# Altium PCB blheli_S.PcbDoc
Units mil, origin at the board's own origin, x right, y up, seen from the top; angles counter-clockwise.
Board outline 550.03 x 1061.13 mil, 4 copper layers (Top Layer, Internal Plane 1, Signal Layer 1, Bottom Layer), stack 30.634 mil thick; 51 components, 33 nets, 180 pads, 52 vias.
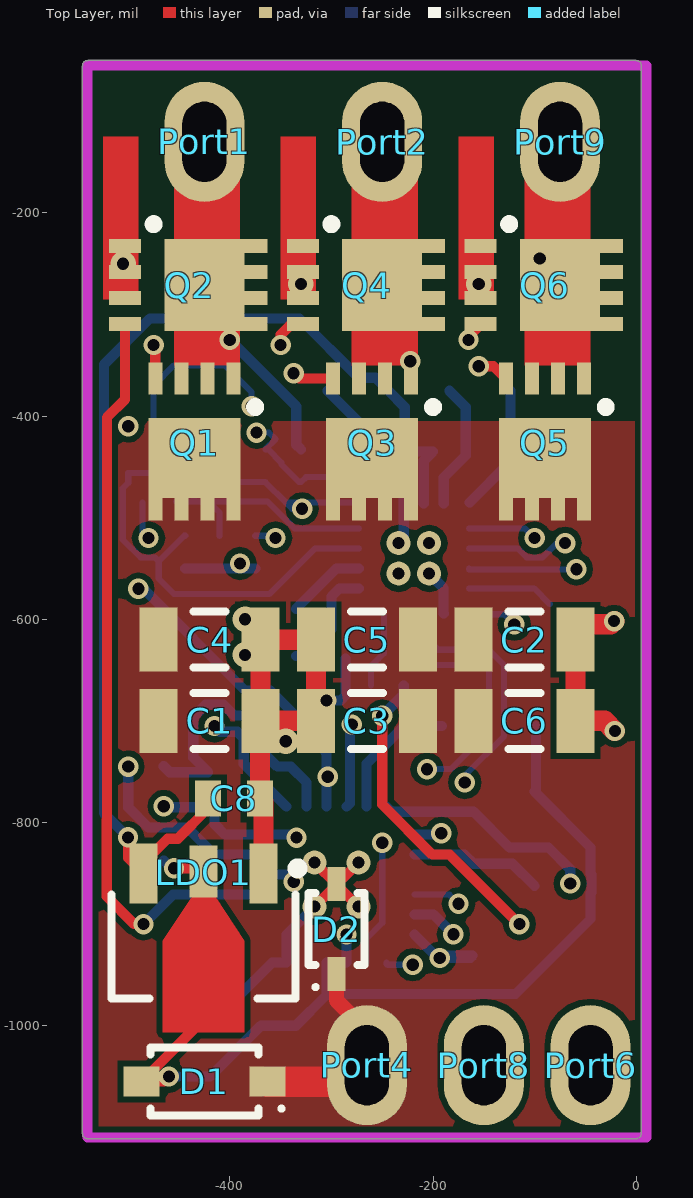
[diagram p0: Top Layer view]
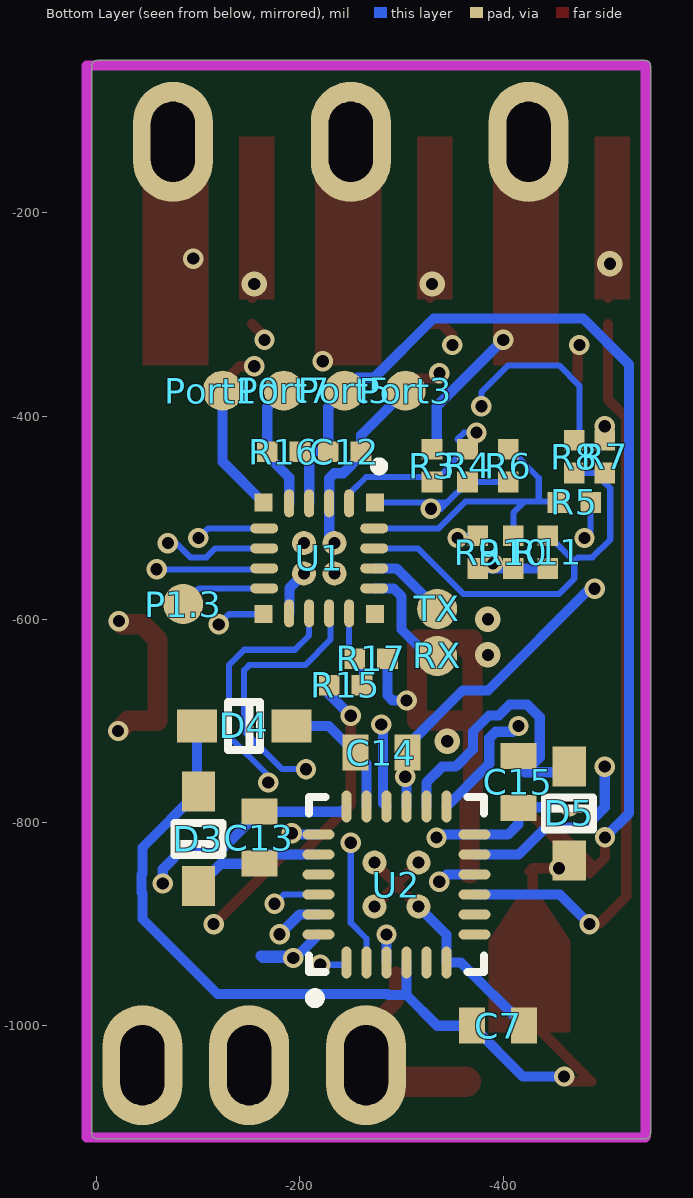
[diagram p1: Bottom Layer view, seen from below]
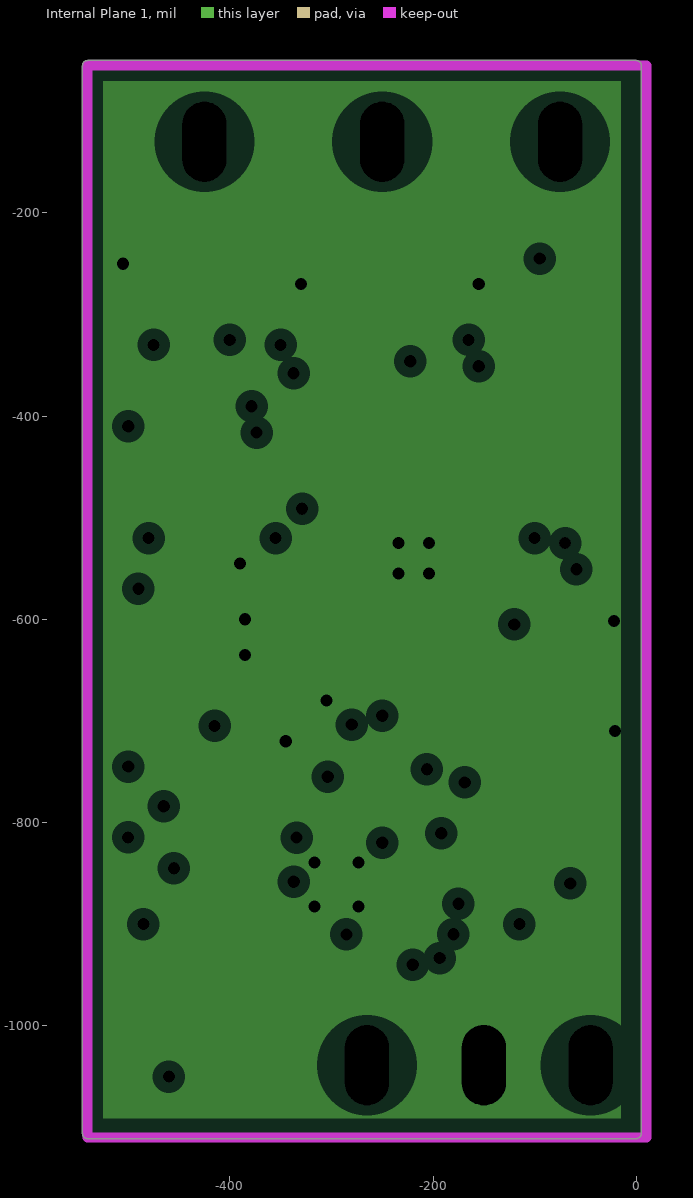
[diagram p2: Internal Plane 1, clearances drawn from the general rule]
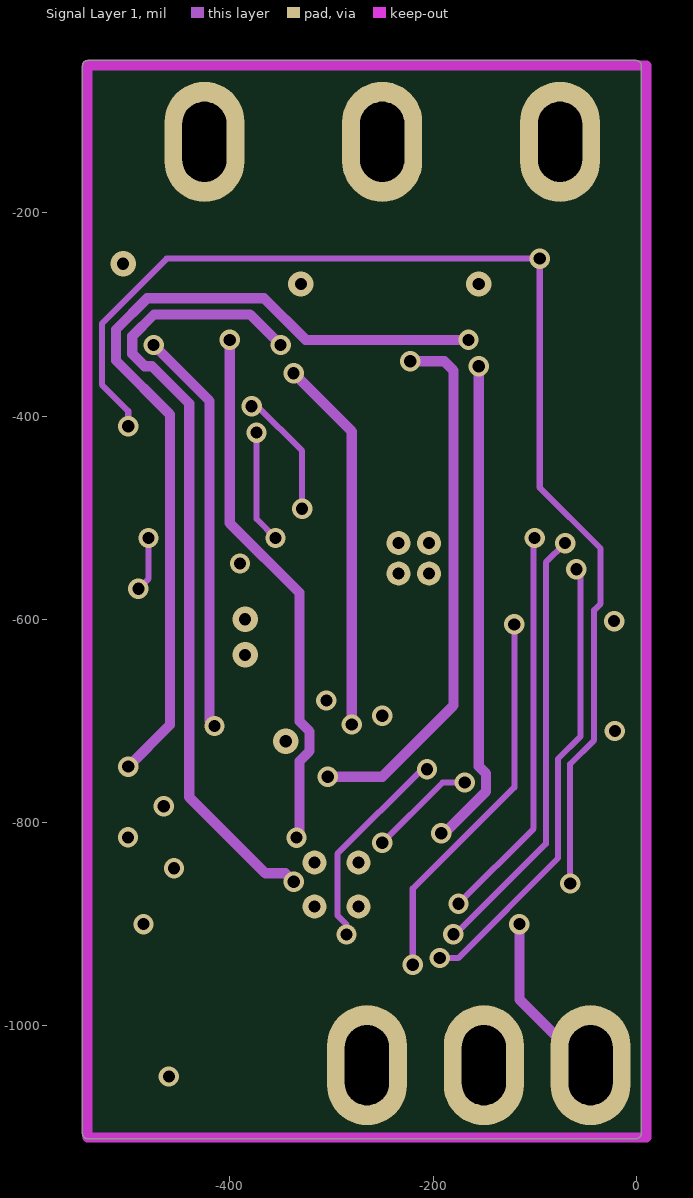
[diagram p3: Signal Layer 1]

## Layer stack, top to bottom
Top Solder: solder mask 0.4, Solder Resist, Dk 3.5
Top Layer: signal copper 1.4
Dielectric 1: core 10, FR-4, Dk 4.2
Internal Plane 1: plane copper 1.417, net GND
Dielectric 3: core 10, Dk 4.2
Signal Layer 1: signal copper 1.417
Dielectric 4: prepreg 5, Dk 4.2
Bottom Layer: signal copper 1.4
Bottom Solder: solder mask 0.4, Solder Resist, Dk 3.5

## Board outline
-545.02,-1106.1 ccw(c-540,-1106.1) -540,-1111.12 0,-1111.12 ccw(c0,-1106.1) 5.02,-1106.1 5.02,-55 ccw(c0,-55) 0,-49.99 -540,-49.99 ccw(c-540,-55) -545.02,-55

## Design rules (kind name [scope] priority, off if disabled: settings)
Clearance [All] p1: gap=6
MinimumSolderMaskSliver [All] p1 off: minsoldermaskwidth=10
PlaneClearance [All] p1: clearance=10
PlaneConnect [All] p1: planeconnectstyle=Direct reliefexpansion=20 reliefentries=4 reliefconductorwidth=10 reliefairgap=10
PolygonConnect [All] p1: connectstyle=Direct reliefconductorwidth=10 reliefentries=4 polygonreliefangle="90 Angle" airgapwidth=10
RoomDefinition BLDC [InComponentClass('BLDC')] p1: confinementstyle=ConfineOut formatcopy=TRUE lockcomponents=FALSE outline 2385,1528.9 3335,1528.9 3335,878.9 2385,878.9
RoutingVias [All] p1: holewidth=12 width=20 viastyle="Through Hole" minholewidth=12 minwidth=20 maxholewidth=28 maxwidth=50
SilkToSolderMaskClearance [IsPad] p1 off: minsilkscreentomaskgap=10 clearancetoexposedcopper=TRUE
SolderMaskExpansion [All] p1: expansion=4
UnpouredPolygon [All] p1: allowunpoured=FALSE
Width [All] p1: maxlimit=100 minlimit=6 preferedwidth=6
25 further rules are at their usual default settings.

## Components (designator, comment, footprint, x,y, rotation, side; value= is the part's Value field where it differs from the comment)
C1 "Cap" 1206_HIGH -420,-700 r0 top
C2 "Cap" 1206_HIGH -110,-620 r0 top
C3 "Cap" 1206_HIGH -265,-700 r180 top
C4 "Cap" 1206_HIGH -420,-620 r0 top
C5 "Cap" 1206_HIGH -265,-620 r180 top
C6 "Cap" 1206_HIGH -110,-700 r0 top
C7 "Cap" 0603_HIGH -395,-1000 r180 bottom
C8 "Cap" 0603_HIGH -395.91,-776.2 r0 top
C12 "Cap" 0402_High -243.9,-435 r180 bottom
C13 "Cap" 0603_HIGH -160,-815 r90 bottom
C14 "Cap" 0603_HIGH -280,-731.1 r180 bottom
C15 "Cap" 0603_HIGH -415,-760 r270 bottom
D1 "SM4001PL-SOD123FL" SOD123 -425,-1055 r180 top
D2 "PESD24L1BA" SODFL250X110-2N -295,-905 r90 top
D3 "1N4148WS" LC-SOD-323 -100,-816.1 r90 bottom
D4 "1N4148WS" LC-SOD-323 -145,-705 r0 bottom
D5 "1N4148WS" LC-SOD-323 -465,-791.1 r270 bottom
LDO1 "HT7533-1" SOT89-150P348X160-3N -425.91,-911.2 r270 top
P1.3 "Port" DEBUG_POINT -85,-585 r180 bottom
Port1 "Port" MOTOR_POINT -425,-130 r90 top
Port2 "Port" MOTOR_POINT -250,-130 r90 top
Port3 "Port" DEBUG_POINT -303.9,-375 r180 bottom
Port4 "Port" POWER_POINT -265,-1038.9 r270 top
Port5 "Port" DEBUG_POINT -243.9,-375 r180 bottom
Port6 "Port" MOTOR_POINT -45,-1038.9 r270 top
Port7 "Port" DEBUG_POINT -183.9,-375 r180 bottom
Port8 "Port" POWER_POINT -150,-1038.9 r270 top
Port9 "Port" MOTOR_POINT -75,-130 r90 top
Port10 "Port" DEBUG_POINT -123.9,-375 r180 bottom
Q1 "MOSFET-N-IRFHM830" PQFN3X3 -435,-426.1 r270 top
Q2 "MOSFET-N-IRFHM830" PQFN3X3 -440,-271.1 r0 top
Q3 "MOSFET-N-IRFHM830" PQFN3X3 -260,-426.1 r270 top
Q4 "MOSFET-N-IRFHM830" PQFN3X3 -265,-271.1 r0 top
Q5 "MOSFET-N-IRFHM830" PQFN3X3 -90,-426.1 r270 top
Q6 "MOSFET-N-IRFHM830" PQFN3X3 -90,-271.1 r0 top
R3 "Res1" 0402_High -330,-448.86 r90 bottom
R4 "Res1" 0402_High -365,-448.86 r90 bottom
R5 "Res1" 0402_High -470,-485 r180 bottom
R6 "Res1" 0402_High -405,-448.86 r90 bottom
R7 "Res1" 0402_High -500,-440 r90 bottom
R8 "Res1" 0402_High -470,-440 r270 bottom
R9 "Res1" 0402_High -375,-533.86 r270 bottom
R10 "Res1" 0402_High -410,-533.86 r270 bottom
R11 "Res1" 0402_High -443.9,-533.86 r270 bottom
R15 "Res1" 0402_High -245,-665 r180 bottom
R16 "Res1" 0402_High -183.9,-435 r0 bottom
R17 "Res1" 0402_High -270,-638.9 r0 bottom
RX "Port" DEBUG_POINT -335,-636.1 r180 bottom
TX "Port" DEBUG_POINT -335,-589.79 r180 bottom
U1 "C8051F850/EFM8BB2" QFN20 -218.9,-540 r270 bottom
U2 "FD6288_QFN24" QFN50P400X400X80_HS-25N -295,-861.1 r90 bottom

## Footprints (in the part's own frame and the unit in brackets; to place one, negate y for a bottom-side part, rotate by r counter-clockwise, add the part's x,y. Pads: shape width x height; smd on the part's side, far side on the other; paste and mask are expansions set on the pad)
0402_High [mm] "Chip Capacitor, 2-Leads, Body 1.00x0.50mm, IPC High Density"
  rect 0.52x0.52 smd mask+0: 1(-0.41,0) 2(0.41,0)
  body extent -0.53,-0.28 0.53,0.28, height 0.4
0603_HIGH [mm] "Chip Capacitor, 2-Leads, Body 1.60x0.85mm, IPC High Density"
  rect 0.65x0.9 smd mask+0: 1(-0.65,0) 2(0.65,0)
  body extent -0.83,-0.48 0.82,0.48, height 0.45
1206_HIGH [mm] "Chip Capacitor, 2-Leads, Body 3.07x1.55mm, IPC High Density"
  rect 0.95x1.6 smd mask+0: 1(-1.275,0) 2(1.275,0)
  silkscreen extent -0.4,-0.7 0.4,0.7, body extent -1.58,-0.83 1.58,0.83, height 0.7
DEBUG_POINT [mm]
  round 1 smd mask+0: 0(0,0)
LC-SOD-323 [mm]
  rect 1x0.83 smd: 1(1.18,0) 2(-1.18,0)
  silkscreen extent -0.4,-0.6 0.4,0.6, body extent -1.35,-0.63 1.35,0.62, height 1.1
MOTOR_POINT [mm] "Motor output pins"
  oval 3x2 hole 1.1 slot 2 at 0 deg mask+0.1: 0(0,0)
POWER_POINT [mm] "power in  pins"
  oval 3x2 hole 1.1 slot 2 at 0 deg mask+0.1: 0(0,0)
PQFN3X3 [mm] "PQFN, 16-Leads, Body 3.30x3.30mm, Pitch 0.65mm, Thermal Pad 2.37x2.37mm, IPC High Density"
  rect 0.8x0.35 smd mask+0: 1(-1.602,0.325) 1(-1.602,0.975) 1(-1.602,-0.325) 2(-1.602,-0.975)
  rect 2x2.3 smd paste+0 mask+0: 3(0.381,0)
  rect 0.7x0.35 smd mask+0: 3(1.602,0.325) 3(1.602,-0.975) 3(1.602,0.975) 3(1.602,-0.325)
  silkscreen extent -0.99,1.42 -0.79,1.62, body extent -1.7,-1.7 1.7,1.7, height 1.05
QFN20 [mm] "For SiliconLib C8051_F850"
  round 0.6 hole 0.3: 0(-0.381,0.381) 0(-0.381,-0.381) 0(0.381,0.381) 0(0.381,-0.381)
  rect 0.45x0.45 smd: 1(-1.397,1.397) 6(-1.397,-1.397) 11(1.397,-1.397) 16(1.397,1.397)
  oval 0.7x0.25 smd: 2(-1.375,0.75) 3(-1.375,0.25) 4(-1.375,-0.25) 5(-1.375,-0.75) 12(1.375,-0.75) 13(1.375,-0.25) 14(1.375,0.25) 15(1.375,0.75)
  oval 0.25x0.7 smd: 7(-0.75,-1.375) 8(-0.25,-1.375) 9(0.25,-1.375) 10(0.75,-1.375) 17(0.75,1.375) 18(0.25,1.375) 19(-0.25,1.375) 20(-0.75,1.375)
  silkscreen extent -2.4,1.4 -2.2,1.6, body extent -1.5,-1.5 1.5,1.5, height 0.8
QFN50P400X400X80_HS-25N [mm] "QFN, 24-Leads, Body 4.00x4.00mm, Pitch 0.50mm, Thermal Pad 2.70x2.70mm, IPC Medium Density"
  round 0.6 hole 0.3: 0(-0.55,0.55) 0(-0.55,-0.55) 0(0.55,0.55) 0(0.55,-0.55)
  oval 0.8x0.25 smd: 1(-1.95,1.25) 2(-1.95,0.75) 3(-1.95,0.25) 4(-1.95,-0.25) 5(-1.95,-0.75) 6(-1.95,-1.25) 13(1.95,-1.25) 14(1.95,-0.75) 15(1.95,-0.25) 16(1.95,0.25) 17(1.95,0.75) 18(1.95,1.25)
  oval 0.25x0.8 smd: 7(-1.25,-1.95) 8(-0.75,-1.95) 9(-0.25,-1.95) 10(0.25,-1.95) 11(0.75,-1.95) 12(1.25,-1.95) 19(1.25,1.95) 20(0.75,1.95) 21(0.25,1.95) 22(-0.25,1.95) 23(-0.75,1.95) 24(-1.25,1.95)
  silkscreen extent -2.96,-2.19 2.19,2.19, body extent -2.04,-2.04 2.04,2.04, height 0.8
SOD123 [mm] "SODFL, 2-Leads, Body 1.60x3.50mm, IPC Medium Density"
  rect 0.9x0.75 smd: 1(-1.575,0) 2(1.575,0)
  silkscreen extent -1.97,-0.85 1.35,0.85, body extent -1.35,-0.85 1.35,0.85, height 1.2
SODFL250X110-2N [mm] "SODFL, 2-Leads, Body 1.25x2.50mm, IPC Medium Density"
  rect 0.85x0.45 smd: 1(-1.125,0) 2(1.125,0)
  silkscreen extent -1.5,-0.7 0.9,0.7, body extent -0.9,-0.67 0.9,0.68, height 1.1
SOT89-150P348X160-3N [mm] "SOT89, 3-Leads, Body 4.50x2.45mm, Pitch 1.50mm, Lead Span 3.5mm, IPC Medium Density"
  rect 1.5x0.7 smd: 1(-1.55,1.5) 3(-1.55,-1.5)
  rect 1.3x0.7 smd: 2(-1.6,0)
  Top Layer region: -0.95,0.3 0.127,1.016 2.413,1.016 2.413,0.254 2.413,-0.254 2.413,-1.016 0.127,-1.016 -0.95,-0.3
  silkscreen extent -1.8,-2.3 1.57,2.48, body extent -1.03,-2.3 1.57,2.3, height 1.6

## Part data
C1 C2 C3 C4 C5 C6 C7 C8 C12 C13 C14 C15: "Capacitor"
D1 D3 D4 D5: library part Diode, "Default Diode"
LDO1: library part LDO
Q1 Q2 Q3 Q4 Q5 Q6: library part MOSFET-N, "N-Channel MOSFET"
R3 R4 R5 R6 R7 R8 R9 R10 R11 R15 R16 R17: "Resistor"
U1: library part C8051F850, "U?"

## Via types
v1: diameter 20, hole 12, Top Layer to Bottom Layer, 46 vias
v2: diameter 25/25/25 (per signal layer), hole 12, Top Layer to Bottom Layer, 6 vias

## Nets (pads, with @x,y where several pads share a name; then routed paths per layer and width w, separated by ;. In a path a pad name is that pad's centre, name@x,y a point inside that pad or via, vN(x,y) a via of type N, cw(c..) or ccw(c..) an arc to the next point about the centre after c; other vN are vias at no path point)
3.3: C8.1 C12.1 LDO1.3 Port5.0 R16.1 U1.4 | length 1100.4
  Top Layer w10: v1(-500.16,-814.65) -500.16,-834.98 LDO1.3 -484.96,-839.67 -461.3,-816 -451.3,-816 -421.5,-786.19 C8.1
  Bottom Layer w10: v1(-500.16,-814.65) -524,-790.81 -524,-349.3 -478.7,-304 -331.5,-304 -273.21,-362.29 -256.61,-362.29 Port5.0 -227.76,-391.14 C12.1 R16.1 -209.06,-444.02 U1.4
A: C13.2 Port9.0 Q5.1 Q6.3 R7.2 U2.18 | length 1442
  Signal Layer 1 w6: v1(-500,-410) -500,-395 -526,-369 -526,-308.88 -462.12,-245 v1(-95,-245) -95,-470.3 -35,-530.3 -35,-584.59 -41.5,-591.09 -41.5,-718.91 -65,-742.41 v1(-65,-860)
  Bottom Layer w10: U2.18 -240.71,-789.41 C13.2 -124.82,-824.59 -86.39,-824.59 -65,-845.98 v1(-65,-860)
B: C14.2 Port2.0 Q3.1 Q4.3 R5.2 U2.15 | length 930.3
  Signal Layer 1 w6: v1(-490,-570) -480,-560 v1(-480,-520)
  Signal Layer 1 w10: v1(-303.53,-755) -250,-755 -180,-685 -180,-355 -189,-346 v1(-222.43,-346)
  Bottom Layer w6: R5.2 -486.14,-513.86 v1(-480,-520)
  Bottom Layer w10: v1(-490,-570) -485,-570 -385,-670 -360,-670 -305.59,-724.41 C14.2 -304.84,-731.85 v1@-304.84,-755 ; U2.15 v1@-304.84,-755 ; v1(-303.53,-755) v1@-304.84,-755
B-COMM: R4.1 R6.1 R8.1 U1.1 | length 468.4
  Signal Layer 1 w6: v1(-378.57,-390.26) -372.85,-390.26 -328.86,-434.25 v1(-328.86,-491.24)
  Bottom Layer w6: R8.1 -475,-418.86 -475,-370 -455,-350 -405,-350 -378.57,-376.43 v1(-378.57,-390.26) ; R6.1 R4.1 -345,-485 ; v1(-328.86,-491.24) -338.76,-491.24 -345,-485 ; U1.1 -345,-485
BA: R7.1 R8.2 R11.1 U1.19 | length 417.3
  Bottom Layer w6: R8.2 R7.1 -500,-465.76 -500.11,-465.76 -505.38,-471.04 -505.38,-521.49 -487.87,-539 -473.9,-539 -470,-542.9 ; R11.1 -444.81,-517.72 -470,-542.9 ; U1.19 -315.94,-530.16 -360.78,-575 -455,-575 -470,-560 -470,-542.9
BB: R5.1 R6.2 R10.1 U1.20 | length 309
  Bottom Layer w6: R5.1@-453.09,-484.24 -420.76,-484.24 ; R10.1 -410,-495 -420.76,-484.24 ; R6.2@-404.08,-432.72 R6.2 -406.8,-432.72 -435,-460.92 -435,-484.24 -420.76,-484.24 ; U1.20 -336.5,-510.47 -362.73,-484.24 -420.76,-484.24
BC: R3.1 R4.2 R9.1 U1.2 | length 317.2
  Signal Layer 1 w6: v1(-373.72,-416.26) -373.72,-501.28 v1(-355,-520)
  Bottom Layer w6: R9.1 -357.28,-517.72 v1(-355,-520) ; v1(-373.72,-416.26) -361.46,-416.26 -355,-422.72 R4.2 -362.28,-432.72 -349.24,-445.76 -349.24,-447.56 -331.8,-465 R3.1 -325,-460 -265,-460 -248.43,-476.57 U1.2
C: C15.2 Port1.0 Q1.1 Q2.3 R3.2 U2.12 | length 881.6
  Top Layer w10: Q2.3@-425,-271.1 -425,-300 v1(-400,-325)
  Signal Layer 1 w10: v1(-400,-325) -400,-505.3 -331.5,-573.8 -331.5,-700.27 -321.5,-710.27 -321.5,-729.73 -331.5,-739.73 -331.5,-812.03 v1(-334.37,-814.9)
  Bottom Layer w10: v1(-465,-784) -464,-785 -415.59,-785 C15.2 -415,-801.69 -404.8,-811.89 U2.12 -337.38,-811.89 v1(-334.37,-814.9) ; v1(-400,-325) -334.58,-390.42 -334.58,-428.13 R3.2
C2CK: Port7.0 R16.2 U1.5 | length 126.5
  Bottom Layer w10: U1.5 -189.37,-460.36 -167.76,-438.75 R16.2 -167.76,-391.14 Port7.0
C2D: Port10.0 U1.6 | length 126.6
  Bottom Layer w10: U1.6 -123.9,-445 Port10.0
GND: C1.2 C2.2 C3.2 C4.2 C5.2 C6.2 C7.2 C8.2 C12.2 D2.2 LDO1.1 Port3.0 Port8.0 Q2.1 Q4.1 Q6.1 R9.2 R10.2 R11.2 R17.1 U1.0 U1.3 U1.12 U2.0 U2.6 | length 1385.8
  Top Layer w10: Q2.1@-503.07,-283.9 Q2.1@-503.07,-232.72 ; Q4.1@-328.07,-283.9 Q4.1@-328.07,-232.72 ; U2.0@-316.65,-882.76 D2.2@-295,-861.1 ; U2.0@-316.65,-839.45 -316.26,-839.45 D2.2 ; U2.0@-273.35,-882.76 D2.2@-295,-861.1 ; U2.0@-273.35,-839.45 -294.61,-860.71 D2.2 ; Q6.1@-153.07,-283.9 Q6.1@-153.07,-232.72 ; D2.2@-295,-861.1 D2.2
  Top Layer w20: C4.2 C5.2 C3.2 C1.2 ; LDO1.1 -366.85,-779.67 C8.2 -370.32,-700.51 C1.2 ; C4.2@-365,-630 -369.8,-634.8 C1.2 ; v1(-21.77,-601.77) -25,-605 -44.8,-605 C2.2 C6.2 -31,-700 v1(-21,-710)
  Bottom Layer w10: R11.2 R10.2 R9.2 ; C7.2 -358.47,-937.87 U2.6 -344.21,-910.31 U2.0@-316.65,-882.76 ; v1(-305,-680) -291.14,-680 -286.14,-675 R17.1 ; Port3.0 -260.04,-418.86 C12.2 -260.04,-438.75 -242.55,-456.24 -233.76,-456.24 -228.74,-461.26 U1.3 -228.74,-519.84 U1.0@-233.9,-525 ; U1.0@-203.9,-555 -189.54,-569.35 -189.54,-593.96 U1.12
  other v1: -390,-545
  other v2: -345,-720 -385,-635 -385,-600 -330,-270 -155,-270 -505,-250
HA: U1.7 U2.22 | length 506.8
  Signal Layer 1 w6: v1(-175,-880) -101,-806 -101,-521 v1(-100,-520)
  Bottom Layer w6: U2.22 -184.05,-870.95 v1(-175,-880) ; U1.7 -109.53,-510.47 v1(-100,-520)
HB: U1.8 U2.23 | length 582.1
  Signal Layer 1 w6: v1(-180,-910) -178.13,-910 -89,-820.87 -89,-544 v1(-70,-525)
  Bottom Layer w6: U1.8 -116.71,-530.16 -107.87,-539 -92.13,-539 -78.13,-525 v1(-70,-525)
  Bottom Layer w10: U2.23 -199.37,-890.63 v1(-180,-910)
HC: U1.9 U2.24 | length 658.6
  Signal Layer 1 w6: v1(-193.38,-933.38) -175.25,-933.38 -77,-835.13 -77,-737.44 -55,-715.44 -55,-554.53 v1(-58.88,-550.65)
  Bottom Layer w6: U1.9 -164.76,-551 -59.23,-551 v1(-58.88,-550.65)
  Bottom Layer w10: U2.24 -197.54,-931 -161,-931 -163.38,-933.38 v1(-193.38,-933.38)
HOA: Q5.2 U2.19 | length 541
  Top Layer w10: v1(-155,-351) -140.42,-351 Q5.2
  Signal Layer 1 w10: v1(-191.97,-810.58) -189.01,-810.58 -147.74,-769.31 -147.74,-751.92 -155,-744.66 v1(-155,-351)
  Bottom Layer w10: U2.19 -193.29,-811.89 v1(-191.97,-810.58)
HOB: Q3.2 U2.16 | length 493.3
  Top Layer w10: v1(-337.18,-357.82) -331.97,-363.03 Q3.2
  Signal Layer 1 w10: v1(-337.18,-357.82) -280,-415 v1(-280,-703.55)
  Bottom Layer w10: U2.16 -281.79,-780.97 -281.79,-705.35 v1(-280,-703.55)
HOC: Q1.2 U2.13 | length 552
  Top Layer w10: v1(-475,-330) -473.39,-331.61 Q1.2
  Signal Layer 1 w10: v1(-475,-330) -420,-385 -420,-700 v1(-415,-705)
  Bottom Layer w10: v1(-415,-705) -409.39,-710.61 -392.73,-710.61 -386.28,-717.06 -386.28,-742.26 U2.13
LA: U1.11 U2.1 | length 452.4
  Signal Layer 1 w6: v1(-220,-940) -220,-865 -219.76,-865.24 -120,-765.47 v1(-120,-605)
  Bottom Layer w6: U2.1 -245.79,-939.21 -245,-940 v1(-220,-940) ; U1.11 -130,-595 v1(-120,-605)
LB: U1.13 U2.2 | length 478.3
  Signal Layer 1 w6: v1@-252.54,-822.54 -190.61,-760.61 v1(-168.74,-760.61)
  Bottom Layer w6: U2.2 -265.47,-914.21 -250,-898.74 v1(-250,-820) ; U1.13 -209.06,-615.94 -195,-630 -145,-630 -130,-645 -130,-715 -168.74,-753.74 v1(-168.74,-760.61)
LC: U1.14 U2.3 | length 493.8
  Signal Layer 1 w6: v1(-285.22,-910.22) -285.22,-900.32 -294.16,-891.38 -294.16,-830.83 -210.82,-747.5 v1(-206,-747.5)
  Bottom Layer w6: U1.14 -230,-595.39 -230,-620 -205,-645 -150,-645 -145,-650 -145,-710 -182.5,-747.5 v1(-206,-747.5)
  Bottom Layer w10: v1(-285.22,-910.22) -285.16,-910.28 U2.3
LOA: Q6.2 U2.11 | length 1053.9
  Top Layer w10: v1(-165,-325) -165,-321.42 Q6.2
  Signal Layer 1 w10: v1(-500,-745) -459,-704 -459,-398.33 -512,-345.33 -512,-314.67 -481.33,-284 -366.3,-284 -325.3,-325 v1(-165,-325)
  Bottom Layer w10: v1(-500,-745) -500,-785 -480,-805 -441.66,-805 -415.08,-831.57 U2.11
LOB: Q4.2 U2.10 | length 859.7
  Top Layer w10: v1(-350,-330) -350,-320 -339.49,-309.49 Q4.2
  Signal Layer 1 w10: v1(-350,-330) -380,-300 -474.7,-300 -496,-321.3 -496,-338.7 -483.7,-351 -476.63,-351 -440,-387.63 -440,-775 -365,-850 -345.43,-850 v1(-337.07,-858.36)
  Bottom Layer w10: U2.10 -344.17,-851.26 v1(-337.07,-858.36)
LOC: Q2.2 U2.9 | length 743.5
  Top Layer w10: Q2.2 -503.07,-383.37 -521,-401.3 -521,-797.31 -521.16,-797.47 -521.16,-872.84 -494,-900 v1(-485,-900)
  Bottom Layer w10: v1(-485,-900) -455.95,-870.95 U2.9
NetP1.3_0: P1.3.0 U1.10 | length 86.2
  Bottom Layer w6: U1.10 -100.47,-569.53 P1.3.0
NetPort6_0: Port6.0 R15.1 | length 508.9
  Top Layer w10: v1(-250,-695) -250,-782.25 -200.67,-831.58 -183.42,-831.58 v1(-115,-900)
  Signal Layer 1 w10: v1(-115,-900) -115,-973.92 -50.02,-1038.9 Port6.0
  Bottom Layer w10: v1(-250,-695) -228.86,-673.86 R15.1 ; Port6.0 Port6.0@-25,-1018.9
NetRX_0: RX.0 U1.17 | length 108.6
  Bottom Layer w10: RX.0 -326.1,-636.1 -300,-610 -300,-577.42 -292.11,-569.53 U1.17
NetTX_0: TX.0 U1.18 | length 78.5
  Bottom Layer w10: TX.0 -295.05,-549.84 U1.18
PWM_IN: R15.2 R17.2 U1.15 | length 76.1
  Bottom Layer w6: R15.2 -261.14,-646.18 R17.2 ; R17.2 -248.43,-633.43 U1.15
VBA: C13.1 D3.2 U2.20 | length 131.1
  Bottom Layer w10: U2.20 -169.02,-831.58 C13.1 -121.97,-840.59 D3.2
VBB: C14.1 D4.2 U2.17 | length 131.6
  Bottom Layer w10: U2.17 -265.47,-742.17 C14.1 -228.31,-705 D4.2
VBC: C15.1 D5.2 U2.14 | length 288.7
  Bottom Layer w10: D5.2 -459.13,-750.51 -421.39,-750.51 -436,-735.9 -436,-696.3 -423.7,-684 -406.3,-684 -395.69,-694.61 -386.1,-694.61 -370.28,-710.43 -370.28,-727.95 -353.23,-745 -340,-745 -324.53,-760.47 U2.14
VCC: C1.1 C2.1 C3.1 C4.1 C5.1 C6.1 D1.1 D2.1 Port4.0 Q1.3 Q3.3 Q5.3 | length 206.7
  Top Layer w15: D2.1 -295,-975 -265,-1005 Port4.0
  Top Layer w30: D1.1 -281.1,-1055 Port4.0
VCC2: C7.1 D1.2 D3.1 D4.1 D5.1 LDO1.2 U2.4 | length 1032
  Top Layer w10: v1(-460,-1050) -465,-1055 D1.2 -429.11,-997.11 LDO1.2@-429.11,-845 ; v1(-455,-845) LDO1.2@-429.11,-845 ; LDO1.2 LDO1.2@-429.11,-845
  Bottom Layer w10: D5.1 -457.56,-845 v1(-455,-845) ; v1(-460,-1050) -419.41,-1050 C7.1 -335,-1000 -304.84,-969.84 ; U2.4 -304.84,-969.84 ; D4.1 -98.54,-768.19 D3.1 -45,-824.65 -45,-850.3 -44,-851.3 -44,-868.7 -45,-869.7 -45,-895 -118.84,-968.84 -285.86,-968.84 -286.86,-969.84 -304.84,-969.84
pads on no net: U1.16 U2.5 U2.7 U2.8 U2.21

## Polygon pours and split planes (outlines as drawn)
VCC on Top Layer "Top Layer-No Net" (solid, remove dead copper, pour order 5): -540,-405 0,-405 0,-1106.1 -540,-1106.1
GND on Internal Plane 1 (split plane): -15.08,-1091.02 -524.92,-1091.02 -524.92,-70.08 -15.08,-70.08

## Keep-outs
Keep-Out Layer:
  lines w10: -540,-1110 10,-1110 10,-55 -540,-55 -540,-1110

## Other copper
Top Layer:
  rectangle net B: -280,-350 -215,-135
  rectangle net A: -110,-350 -45,-135
  rectangle net C: -455,-350 -390,-135
  rectangle net GND: -525,-285 -490,-125
  rectangle net GND: -350,-285 -315,-125
  rectangle net GND: -175,-285 -140,-125